# EAGLE board IOIO-OTG Silkscreen (EAGLE 9.5.1)
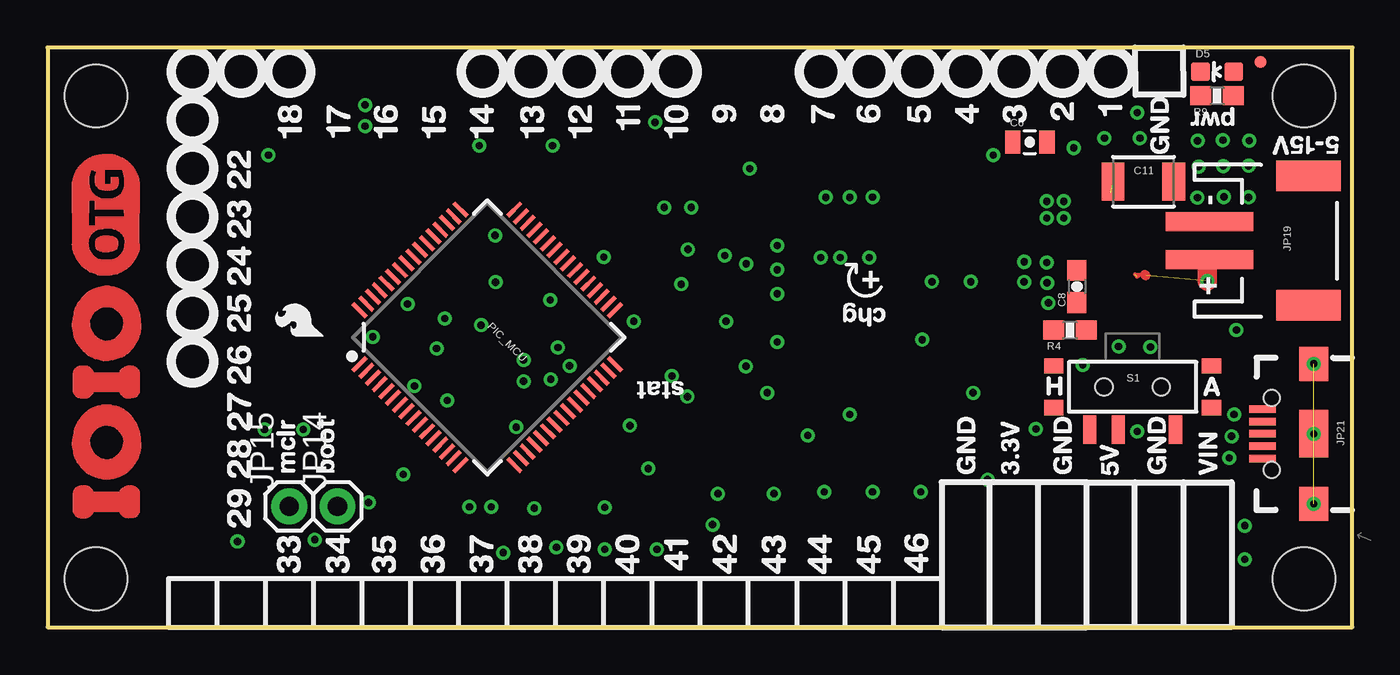
[diagram p0: board, top side]
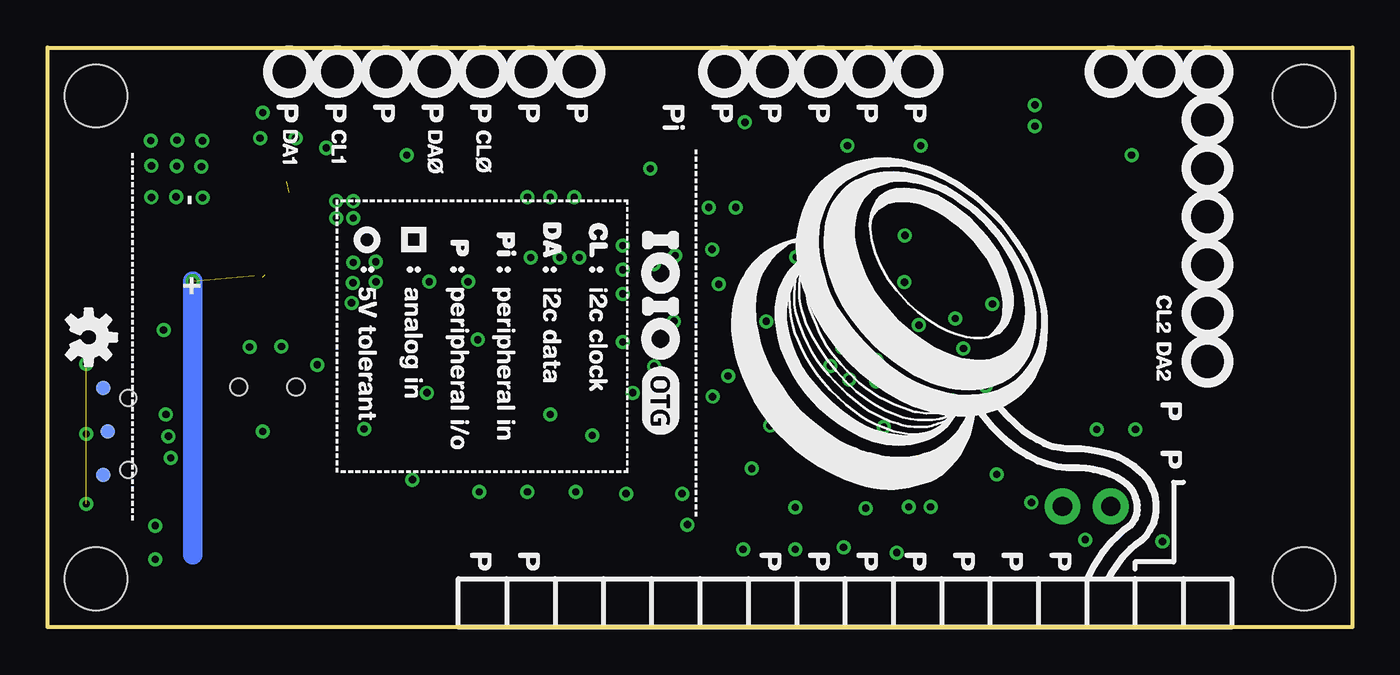
[diagram p1: board, bottom side, seen from below]

Size 68.58 x 30.48 mm. Coordinates in mm from the lower left corner, seen from the top.
Outline: 0,0 68.58,0 68.58,30.48 0,30.48 0,0
Copper layers (1*16): Top 0.035mm / dielectric 1.5mm / Bottom 0.035mm
Design rules "SparkFun-2-layer-TIGHT": minimum track width 7mil, minimum drill 15mil, track to track 7mil, track to pad 7mil, pad to pad 7mil, via to via 7mil, smd to smd 7mil, copper to edge 7mil, drill to drill 7mil, minimum pad ring 7mil, minimum via ring 7mil, stop-mask expansion 4mil, vias tented up to drill 20mil, thermal gap 10mil
tRestrict: area 44.6,23 to 51.6,23.7; area 54.1,22.4 to 55,22.6; area 54.1,21.9 to 55,22.1; area 54.2,22.9 to 55,23.1; area 53.9,23 to 54.1,23.9; area 52.9,23.1 to 53.1,24; area 52.4,23.1 to 52.6,23.9; area 51.9,23 to 52.1,23.9; area 50.9,22.8 to 51.8,23; area 50.9,22.3 to 51.8,22.5; area 50.9,21.8 to 51.8,22; area 50.9,21.3 to 51.8,21.5; area 52.4,19.9 to 52.6,20.8; area 52.9,19.9 to 53.1,20.8; area 53.4,19.9 to 53.6,20.8; area 53.9,19.9 to 54.1,20.8; area 51.8,19.9 to 52,20.8; area 52,21 to 52.1,22.8; area 53.8,21 to 54,22.8; area 52.3,20.9 to 52.6,21.1; area 52.8,20.9 to 53.1,21.1; area 53.3,20.9 to 53.6,21.1; area 52.3,22.8 to 52.6,23; area 52.8,22.8 to 53.1,23; area 53.3,22.8 to 53.6,23

## Footprints (pad centres in the part's own frame; a part is rotated, then mirrored left to right if it is on the bottom)
0805-CAP = smd 0.8 x 1.2: 1 -0.9,0; 2 0.9,0
0603-CAP = smd 1.1 x 1: 1 -0.85,0; 2 0.85,0
1210 = smd 1.2 x 2: 1 -1.6,0; 2 1.6,0
LED-0603 = smd 1 x 1: A 0,-0.877; C 0,0.877
TQFP100 = smd 1.5 x 0.35: 1 -8,6; 2 -8,5.5; 3 -8,5; 4 -8,4.5; 5 -8,4; 6 -8,3.5; 7 -8,3; 8 -8,2.5; 9 -8,2; 10 -8,1.5; 11 -8,1; 12 -8,0.5; 13 -8,0; 14 -8,-0.5; 15 -8,-1; 16 -8,-1.5; 17 -8,-2; 18 -8,-2.5; 19 -8,-3; 20 -8,-3.5; 21 -8,-4; 22 -8,-4.5; 23 -8,-5; 24 -8,-5.5; 25 -8,-6; 51 8,-6; 52 8,-5.5; 53 8,-5; 54 8,-4.5; 55 8,-4; 56 8,-3.5; 57 8,-3; 58 8,-2.5; 59 8,-2; 60 8,-1.5; 61 8,-1; 62 8,-0.5; 63 8,0; 64 8,0.5; 65 8,1; 66 8,1.5; 67 8,2; 68 8,2.5; 69 8,3; 70 8,3.5; 71 8,4; 72 8,4.5; 73 8,5; 74 8,5.5; 75 8,6 | smd 0.35 x 1.5: 26 -6,-8; 27 -5.5,-8; 28 -5,-8; 29 -4.5,-8; 30 -4,-8; 31 -3.5,-8; 32 -3,-8; 33 -2.5,-8; 34 -2,-8; 35 -1.5,-8; 36 -1,-8; 37 -0.5,-8; 38 0,-8; 39 0.5,-8; 40 1,-8; 41 1.5,-8; 42 2,-8; 43 2.5,-8; 44 3,-8; 45 3.5,-8; 46 4,-8; 47 4.5,-8; 48 5,-8; 49 5.5,-8; 50 6,-8; 76 6,8; 77 5.5,8; 78 5,8; 79 4.5,8; 80 4,8; 81 3.5,8; 82 3,8; 83 2.5,8; 84 2,8; 85 1.5,8; 86 1,8; 87 0.5,8; 88 0,8; 89 -0.5,8; 90 -1,8; 91 -1.5,8; 92 -2,8; 93 -2.5,8; 94 -3,8; 95 -3.5,8; 96 -4,8; 97 -4.5,8; 98 -5,8; 99 -5.5,8; 100 -6,8
STAND-OFF = hole 3.302: 0,0
1X01 = drill 1.016 pad 1.88: 1 0,0
MICRO-FIDUCIAL = smd 0.635 x 0.635: 1 0,0
JST-2-SMD = smd 1 x 4.6: 1 -1,-3.7; 2 1,-3.7 | smd 1.6 x 3.4: NC1 -3.4,1.5; NC2 3.4,1.5
USB-AB-MICRO-SMD_V03 = smd 1.4 x 0.4: D+1 2.7,0; D-1 2.7,0.65; GND1 2.7,-1.3; ID1 2.7,-0.65; VBUS1 2.7,1.3 | smd 1.5 x 1.8: SHIELD1 0,3.68; SHIELD3 0,-3.68 | smd 1.5 x 2.5: SHIELD2 0,0 | hole 0.85: 2.2,1.9; 2.2,-1.9
PIC24FXXX_TQFP64 = smd 0.22 x 1: 1 -3.75,-5.75; 2 -3.25,-5.75; 3 -2.75,-5.75; 4 -2.25,-5.75; 5 -1.75,-5.75; 6 -1.25,-5.75; 7 -0.75,-5.75; 8 -0.25,-5.75; 9 0.25,-5.75; 10 0.75,-5.75; 11 1.25,-5.75; 12 1.75,-5.75; 13 2.25,-5.75; 14 2.75,-5.75; 15 3.25,-5.75; 16 3.75,-5.75; 33 3.75,5.75; 34 3.25,5.75; 35 2.75,5.75; 36 2.25,5.75; 37 1.75,5.75; 38 1.25,5.75; 39 0.75,5.75; 40 0.25,5.75; 41 -0.25,5.75; 42 -0.75,5.75; 43 -1.25,5.75; 44 -1.75,5.75; 45 -2.25,5.75; 46 -2.75,5.75; 47 -3.25,5.75; 48 -3.75,5.75 | smd 1 x 0.22: 17 5.75,-3.75; 18 5.75,-3.25; 19 5.75,-2.75; 20 5.75,-2.25; 21 5.75,-1.75; 22 5.75,-1.25; 23 5.75,-0.75; 24 5.75,-0.25; 25 5.75,0.25; 26 5.75,0.75; 27 5.75,1.25; 28 5.75,1.75; 29 5.75,2.25; 30 5.75,2.75; 31 5.75,3.25; 32 5.75,3.75; 49 -5.75,3.75; 50 -5.75,3.25; 51 -5.75,2.75; 52 -5.75,2.25; 53 -5.75,1.75; 54 -5.75,1.25; 55 -5.75,0.75; 56 -5.75,0.25; 57 -5.75,-0.25; 58 -5.75,-0.75; 59 -5.75,-1.25; 60 -5.75,-1.75; 61 -5.75,-2.25; 62 -5.75,-2.75; 63 -5.75,-3.25; 64 -5.75,-3.75
0603-RES = smd 1.1 x 1: 1 -0.85,0; 2 0.85,0
KPS-1290 = smd 0.7 x 1.5: O -2.25,2.25; P 0.75,2.25; S 2.25,2.25 | smd 1 x 0.8: P$1 -4.15,1.1; P$2 -4.15,-1.1; P$3 4.15,-1.1; P$4 4.15,1.1 | hole 0.9: -1.5,0; 1.5,0
PAD.03X.03 = smd 0.762 x 0.762: P$1 0,0

## Placement (x,y rotation side)
C6  10uF  [0805-CAP]  51.63,25.51 0 top
C8  3.3nF  [0603-CAP]  54.1,17.91 270 top
C11  10uF  [1210]  57.6,23.43 0 top
D5  Red  [LED-0603]  61.47,29.21 90 top
FRAME2  FRAME-LEDGER  [CREATIVE_COMMONS]  5.08,-11.43 0 top  (outside the outline)
IC1  [TQFP100]  -19.05,30.48 0 top  (outside the outline)
IC2  [TQFP100]  -19.05,10.16 0 top  (outside the outline)
JP10  STAND-OFF  [STAND-OFF]  66.04,27.94 0 top
JP11  STAND-OFF  [STAND-OFF]  66.04,2.54 0 top
JP12  STAND-OFF  [STAND-OFF]  2.54,27.94 0 top
JP13  STAND-OFF  [STAND-OFF]  2.54,2.54 0 top
JP14  [1X01]  15.24,6.35 0 top
JP15  [1X01]  12.7,6.35 0 top
JP16  FIDUCIALUFIDUCIAL  [MICRO-FIDUCIAL]  63.75,29.72 0 top
JP19  JST  [JST-2-SMD]  64.77,20.32 270 top
JP21  AB MICRO USB  [USB-AB-MICRO-SMD_V03]  66.55,10.16 180 top
LOGO1  OSHW-LOGOS  [OSHW-LOGO-S]  66.42,15.24 270 bottom
LOGO3  SFE_LOGO_FLAME.1_INCH  [SFE_LOGO_FLAME_.1]  14.86,14.99 90 top
PIC_MCU  PIC24FJ256GB206  [PIC24FXXX_TQFP64]  23.11,15.24 315 top
R4  3.3k  [0603-RES]  53.74,15.61 180 top
R9  1.6K  [0603-RES]  61.47,27.94 180 top
S1  SWITCH_SPDT  [KPS-1290]  57.02,12.64 180 top
TP1  TEST-POINT3  [PAD.03X.03]  65.66,12.57 0 bottom
TP2  TEST-POINT3  [PAD.03X.03]  65.41,10.29 0 bottom
TP3  TEST-POINT3  [PAD.03X.03]  65.66,8 0 bottom
U$6  IOIO-OTG  [IOIO-OTG-COPPER-EXPOSED]  4.83,5.71 90 top

## Library data of the parts
C6 = SparkFun-Capacitors; PART#: LMK212BJ106KG-T; PROD_ID: CAP-11330
C8 = SparkFun-Capacitors; PROD_ID: CAP-09633
C11 = SparkFun-Capacitors; PART#: UMK325C7106MM-T; PROD_ID: CAP-09824
D5 = SparkFun-LED; PROD_ID: DIO-11154
FRAME2 LOGO1 LOGO3 U$6 = SparkFun-Aesthetics
IC1 IC2 = amd-mach; OC_FARNELL: unknown; OC_NEWARK: unknown
JP10-JP16 = SparkFun
JP19 = SparkFun-Connectors; BTM_NEG: -; BTM_POS: +; PROD_ID: CONN-11443; TOP_NEG: -; TOP_POS: +
JP21 = SparkFun-Connectors; PROD_ID: CONN-11794
PIC_MCU = SparkFun-DigitalIC; PROD_ID: IC-11312
R4 = SparkFun-Resistors; PROD_ID: RES-07851
R9 = SparkFun-Resistors; PROD_ID: RES-08361
S1 = SparkFun-Electromechanical; PROD_ID: SWCH-10651
TP1-TP3 = SparkFun-Passives

## Nets
ANCHOR1: JP21.SHIELD1 JP21.SHIELD2 JP21.SHIELD3
GND: IC1.13 IC1.26 IC1.39 IC1.50 IC1.63 IC1.76 IC1.89 IC1.100 IC2.13 IC2.26 IC2.39 IC2.50 IC2.63 IC2.76 IC2.89 IC2.100
S$4: C11.1
S$16: C6.1
VCC: IC1.12 IC1.40 IC1.62 IC1.90 IC2.12 IC2.40 IC2.62 IC2.90
VIN: JP19.2

## Tracks (layer width: path | path; a pad name or v marks a point on that pad's centre or on a via)
3.3V  (via drill 0.38 pad 0.64)
  other vias: 36.7,13.72
ANCHOR1  (via drill 0.38)  (4 unrouted)
  other vias: 66.55,10.16 66.55,13.84 66.55,6.48
BOOT  (via drill 0.38 pad 0.64)
  other vias: 34.95,5.38
GND  (15 unrouted)
HOST  (via drill 0.38 pad 0.64)
  other vias: 26.42,17.2
PIN30  (via drill 0.38 pad 0.64)
  other vias: 19.28,12.67
S$2  (via drill 0.38 pad 0.64)
  other vias: 38.35,14.99
S$3  (via drill 0.38 pad 0.64)
  other vias: 45.97,15.11
S$4  (1 unrouted)
  Top 0.279: 55.73,22.71 55.88,22.86
S$5  (via drill 0.38 pad 0.64)
  other vias: 57.28,27.05
S$6  (via drill 0.38 pad 0.64)
  other vias: 53.93,25.2
S$7  (via drill 0.38 pad 0.64)
  other vias: 33.3,18.03
S$8  (via drill 0.38 pad 0.64)
  other vias: 29.24,19.46
S$9  (via drill 0.38 pad 0.64)
  other vias: 36.72,19.1
S$12  (via drill 0.38 pad 0.64)
  other vias: 18.69,8.03
S$13  (via drill 0.38 pad 0.64)
  other vias: 20.88,16.23
S$14  (via drill 0.38 pad 0.64)
  other vias: 49.71,24.82
S$15  (via drill 0.38 pad 0.64)
  other vias: 29.29,6.3
S$17  (via drill 0.38 pad 0.64)
  other vias: 30.61,10.59
S$20  (via drill 0.38 pad 0.64)
  other vias: 32.82,13.21
S$21  (via drill 0.38 pad 0.64)
  other vias: 23.32,6.32
S$22  (via drill 0.38 pad 0.64)
  other vias: 62.92,5.33
S$23  (via drill 0.38 pad 0.64)
  other vias: 62.92,3.56
S$24  (via drill 0.38 pad 0.64)
  other vias: 62.48,15.62
S$25  (via drill 0.38 pad 0.64)
  other vias: 63.15,25.58
S$26  (via drill 0.38 pad 0.64)
  other vias: 57.28,10.29
S$27  (via drill 0.38 pad 0.64)
  other vias: 51.94,10.41
S$28  (via drill 0.38 pad 0.64)
  other vias: 57.96,14.73
S$29  (via drill 0.38 pad 0.64)
  other vias: 63.12,24.26
S$30  (via drill 0.38 pad 0.64)
  other vias: 61.78,25.61
S$31  (via drill 0.38 pad 0.64)
  other vias: 63.12,22.61
S$32  (via drill 0.38 pad 0.64)
  other vias: 61.83,22.63
S$33  (via drill 0.38 pad 0.64)
  other vias: 60.44,25.57
S$34  (via drill 0.38 pad 0.64)
  other vias: 61.79,24.24
S$35  (via drill 0.38 pad 0.64)
  other vias: 56.29,14.76
S$36  (via drill 0.38 pad 0.64)
  other vias: 54.41,13.79
S$37  (via drill 0.38 pad 0.64)
  other vias: 53.4,21.51
S$38  (via drill 0.38 pad 0.64)
  other vias: 60.5,24.22
S$39  (via drill 0.38 pad 0.64)
  other vias: 60.43,22.58
S$40  (via drill 0.38 pad 0.64)
  other vias: 52.6,17.05
S$41  (via drill 0.38 pad 0.64)
  other vias: 57.41,25.71
S$42  (via drill 0.38 pad 0.64)
  other vias: 55.55,25.72
S$43  (via drill 0.38 pad 0.64)
  other vias: 52.53,18.11
S$44  (via drill 0.38 pad 0.64)
  other vias: 52.51,22.4
S$45  (via drill 0.38 pad 0.64)
  other vias: 53.4,22.4
S$46  (via drill 0.38 pad 0.64)
  other vias: 52.51,21.51
S$47  (via drill 0.38 pad 0.64)
  other vias: 41.66,19.43
S$48  (via drill 0.38 pad 0.64)
  other vias: 52.52,19.16
S$49  (via drill 0.38 pad 0.64)
  other vias: 51.34,19.21
S$50  (via drill 0.38 pad 0.64)
  other vias: 43.36,22.61
S$51  (via drill 0.38 pad 0.64)
  other vias: 42.16,22.61
S$52  (via drill 0.38 pad 0.64)
  other vias: 51.32,18.16
S$53  (via drill 0.38 pad 0.64)
  other vias: 38.35,17.53
S$54  (via drill 0.38 pad 0.64)
  other vias: 48.51,18.16
S$55  (via drill 0.38 pad 0.64)
  other vias: 46.48,18.16
S$56  (via drill 0.38 pad 0.64)
  other vias: 43.18,19.43
S$57  (via drill 0.38 pad 0.64)
  other vias: 40.64,19.43
S$58  (via drill 0.38 pad 0.64)
  other vias: 40.89,22.61
S$59  (via drill 0.38 pad 0.64)
  other vias: 36.91,24.1
S$60  (via drill 0.38 pad 0.64)
  other vias: 38.35,20.07
S$61  (via drill 0.38 pad 0.64)
  other vias: 35.59,19.53
S$62  (via drill 0.38 pad 0.64)
  other vias: 33.63,12.12
S$63  (via drill 0.38 pad 0.64)
  other vias: 42.16,11.18
S$64  (via drill 0.38 pad 0.64)
  other vias: 37.82,12.32
S$65  (via drill 0.38 pad 0.64)
  other vias: 45.9,7.11
S$66  (via drill 0.38 pad 0.64)
  other vias: 33.66,19.86
S$67  (via drill 0.38 pad 0.64)
  other vias: 16.69,27.46
S$68  (via drill 0.38 pad 0.64)
  other vias: 11.61,24.82
S$69  (via drill 0.38 pad 0.64)
  other vias: 33.83,22.07
S$70  (via drill 0.38 pad 0.64)
  other vias: 31.93,26.54
S$71  (via drill 0.38 pad 0.64)
  other vias: 43.36,7.11
S$72  (via drill 0.38 pad 0.64)
  other vias: 39.95,10.08
S$73  (via drill 0.38 pad 0.64)
  other vias: 40.82,7.11
S$74  (via drill 0.38 pad 0.64)
  other vias: 32.41,22.07
S$75  (via drill 0.38 pad 0.64)
  other vias: 16.69,26.34
S$76  (via drill 0.38 pad 0.64)
  other vias: 38.18,7.01
S$77  (via drill 0.38 pad 0.64)
  other vias: 35.23,7.01
S$78  (via drill 0.38 pad 0.64)
  other vias: 26.54,25.32
S$79  (via drill 0.38 pad 0.64)
  other vias: 22.68,25.32
S$80  (via drill 0.38 pad 0.64)
  other vias: 17.09,15.27
S$81  (via drill 0.38 pad 0.64)
  other vias: 31.57,8.33
S$82  (via drill 0.38 pad 0.64)
  other vias: 18.92,16.99
S$83  (via drill 0.38 pad 0.64)
  other vias: 21.01,11.91
S$84  (via drill 0.38 pad 0.64)
  other vias: 23.52,20.6
S$85  (via drill 0.38 pad 0.64)
  other vias: 23.55,18.14
S$86  (via drill 0.38 pad 0.64)
  other vias: 20.45,14.66
S$87  (via drill 0.38 pad 0.64)
  other vias: 22.78,15.88
S$88  (via drill 0.38 pad 0.64)
  other vias: 25.02,14.05
S$89  (via drill 0.38 pad 0.64)
  other vias: 26.44,13.03
S$90  (via drill 0.38 pad 0.64)
  other vias: 25.02,12.93
S$91  (via drill 0.38 pad 0.64)
  other vias: 32.03,4.09
S$92  (via drill 0.38 pad 0.64)
  other vias: 24.64,10.52
S$93  (via drill 0.38 pad 0.64)
  other vias: 29.29,4.09
S$94  (via drill 0.38 pad 0.64)
  other vias: 26.75,4.19
S$95  (via drill 0.38 pad 0.64)
  other vias: 25.58,6.25
S$96  (via drill 0.38 pad 0.64)
  other vias: 22.17,6.32
S$97  (via drill 0.38 pad 0.64)
  other vias: 23.95,3.91
S$98  (via drill 0.38 pad 0.64)
  other vias: 13.44,10.39
S$99  (via drill 0.38 pad 0.64)
  other vias: 16.87,6.55
S$100  (via drill 0.38 pad 0.64)
  other vias: 11.4,10.39
S$101  (via drill 0.38 pad 0.64)
  other vias: 14.05,4.6
S$102  (via drill 0.38 pad 0.64)
  other vias: 9.98,4.5
S$104  (via drill 0.38 pad 0.64)
  other vias: 26.82,14.71
S$106  (via drill 0.38 pad 0.64)
  other vias: 27.43,13.74
S$132  (via drill 0.38 pad 0.64)
  other vias: 62.1,8.89
S$137  (via drill 0.38 pad 0.64)
  other vias: 62.23,10.03
S$142  (via drill 0.38 pad 0.64)
  other vias: 38.35,18.8
S$145  (via drill 0.38 pad 0.64)
  other vias: 62.36,11.18
S$148  (via drill 0.38 pad 0.64)
  other vias: 30.81,16.08
S$152  (via drill 0.38 pad 0.64)
  other vias: 48.64,12.32
USBID  (via drill 0.38 pad 0.64)
  other vias: 35.66,16.08
VBUS  (via drill 0.38 pad 0.64)
  other vias: 49.4,7.75
VCC  (7 unrouted)
VIN  (via drill 0.38 pad 0.64)  (2 unrouted)
  Top 0.203: 57.15,18.54 57.66,18.54 | 57.26,18.42 57.35,18.51
  Top 0.508: 57.66,18.54 57.71,18.49
  Top 1.016: v60.96,18.19 60.96,19.21 JP19.2
  Bottom 1.016: 60.96,3.81 v60.96,18.19

## Text on the board
tPlace: +
Measures: Units are in inches
tDocu: Ytai Ben-tsvi | Revised by: | Aaron Weiss, Pete Lewis